# EAGLE board E-Piano-SM (EAGLE 9.4.0)
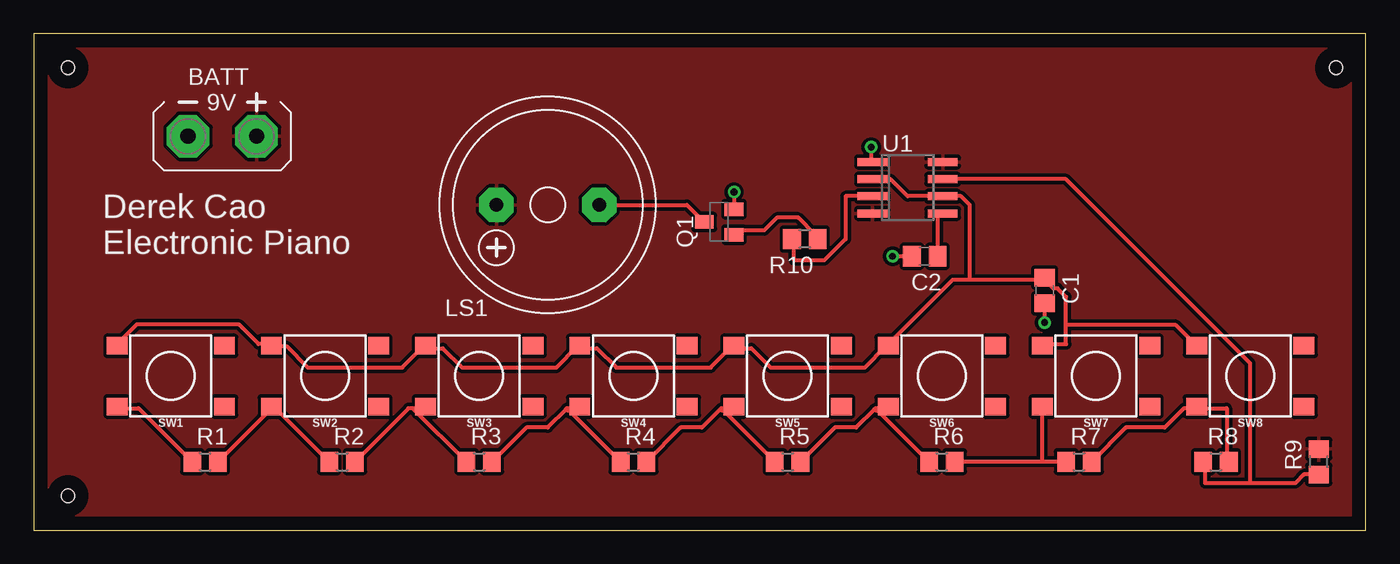
[diagram p0: board, top side]
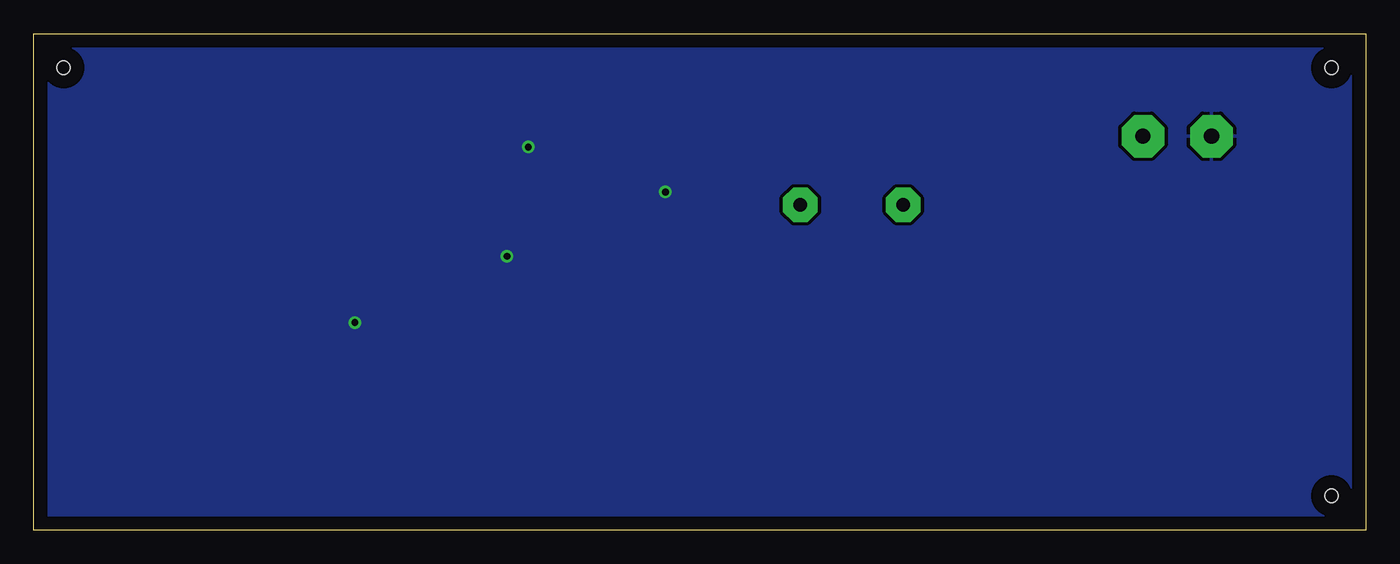
[diagram p1: board, bottom side, seen from below]

Size 98.73 x 36.82 mm. Coordinates in mm from the lower left corner, seen from the top.
Outline: 0,0 98.73,0 98.73,36.82 0,36.82 0,0
Copper layers (1*16): Top 0.035mm / dielectric 1.5mm / Bottom 0.035mm
Design rules "default": minimum track width 6mil, minimum drill 0.35mm, track to track 6mil, track to pad 6mil, pad to pad 6mil, via to via 6mil, smd to smd 6mil, copper to edge 40mil, drill to drill 6mil, minimum pad ring 10mil, minimum via ring 8mil, stop-mask expansion 4mil, vias tented up to drill 0mil, thermal gap 10mil
Net classes: 0 default: width 0.305 mm, drill 0.508 mm, clearance 0.254 mm
Holes 1 mm at 2.54,34.29 2.54,2.54 96.52,34.29

## Footprints (pad centres in the part's own frame; a part is rotated, then mirrored left to right if it is on the bottom)
AB9V = drill 1.118 pad 3.15 octagon: + 0,2.54; - 0,-2.54
C0805 = smd 1.3 x 1.5: 1 -0.95,0; 2 0.95,0
F/HMB = drill 1.016 pad 2.54 octagon: + 3.81,0; - -3.81,0
SOT23-BEC = smd 1 x 1.4: B -0.95,-1.1; C 0,1.1; E 0.95,-1.1
R0805 = smd 1.3 x 1.5: 1 -0.95,0; 2 0.95,0
TACTILE_SWITCH_SMD_6.2MM_TALL = smd 1.55 x 1.3: A1 -3.975,-2.25; A2 3.975,-2.25; B1 -3.975,2.25; B2 3.975,2.25
SO08 = smd 0.6 x 2.2: 1 -1.905,-2.6; 2 -0.635,-2.6; 3 0.635,-2.6; 4 1.905,-2.6; 5 1.905,2.6; 6 0.635,2.6; 7 -0.635,2.6; 8 -1.905,2.6

## Placement (x,y rotation side)
BATT  AB9V  [AB9V]  13.97,29.21 270 top
C1  0.1uF  [C0805]  74.93,17.78 270 top
C2  0.1uF  [C0805]  66.04,20.32 180 top
LS1  [F/HMB]  38.1,24.13 180 top
Q1  BCW66  [SOT23-BEC]  50.8,22.86 90 top
R1  1.5K  [R0805]  12.7,5.08 0 top
R2  1.3K  [R0805]  22.86,5.08 0 top
R3  620  [R0805]  33.02,5.08 0 top
R4  1.1K  [R0805]  44.45,5.08 0 top
R5  1K  [R0805]  55.88,5.08 0 top
R6  910  [R0805]  67.31,5.08 0 top
R7  390  [R0805]  77.47,5.08 0 top
R8  6.2K  [R0805]  87.63,5.08 0 top
R9  1K  [R0805]  95.25,5.08 90 top
R10  1K  [R0805]  57.15,21.59 180 top
SW1  MOMENTARY-SWITCH-SPST-SMD-6.2MM-TALL  [TACTILE_SWITCH_SMD_6.2MM_TALL]  10.16,11.43 180 top
SW2  MOMENTARY-SWITCH-SPST-SMD-6.2MM-TALL  [TACTILE_SWITCH_SMD_6.2MM_TALL]  21.59,11.43 180 top
SW3  MOMENTARY-SWITCH-SPST-SMD-6.2MM-TALL  [TACTILE_SWITCH_SMD_6.2MM_TALL]  33.02,11.43 180 top
SW4  MOMENTARY-SWITCH-SPST-SMD-6.2MM-TALL  [TACTILE_SWITCH_SMD_6.2MM_TALL]  44.45,11.43 180 top
SW5  MOMENTARY-SWITCH-SPST-SMD-6.2MM-TALL  [TACTILE_SWITCH_SMD_6.2MM_TALL]  55.88,11.43 180 top
SW6  MOMENTARY-SWITCH-SPST-SMD-6.2MM-TALL  [TACTILE_SWITCH_SMD_6.2MM_TALL]  67.31,11.43 180 top
SW7  MOMENTARY-SWITCH-SPST-SMD-6.2MM-TALL  [TACTILE_SWITCH_SMD_6.2MM_TALL]  78.74,11.43 180 top
SW8  MOMENTARY-SWITCH-SPST-SMD-6.2MM-TALL  [TACTILE_SWITCH_SMD_6.2MM_TALL]  90.17,11.43 180 top
U1  NE555D  [SO08]  64.77,25.4 270 top

## Library data of the parts
BATT = battery
C1 C2 = rcl; MOUSER#: 791-MT21B104K500CT; MPN: MT21B104K500CT; OC_NEWARK: unknown; SPICEPREFIX: C
LS1 = buzzer; MOUSER#: 665-AST-01508MR-R; OC_FARNELL: unknown; OC_NEWARK: unknown
Q1 = transistor; MF: INFINION TECHNOLOGIES; MOUSER#: 726-BCW66KHE6327HTSA; MPN: BCW66KHE6327HTSA1; OC_NEWARK: 58K2048
R1 = rcl; MOUSER#: 652-CR0805FX-1501ELF; MPN: CR0805FX-1501ELF; OC_NEWARK: unknown; SPICEPREFIX: R
R2 = rcl; MOUSER#: 652-CR0805JW-132ELF; MPN: CR0805JW-132ELF; OC_NEWARK: unknown; SPICEPREFIX: R
R3 = rcl; MOUSER#: 652-CR0805JW-621ELF; MPN: CR0805JW-621ELF; OC_NEWARK: unknown; SPICEPREFIX: R
R4 = rcl; MOUSER#: 652-CR0805FX-1101ELF; MPN: CR0805FX-1101ELF; OC_NEWARK: unknown; SPICEPREFIX: R
R5 R9 R10 = rcl; MOUSER#: 652-CR0805FX-1001ELF; MPN: CR0805FX-1001ELF; OC_NEWARK: unknown; SPICEPREFIX: R
R6 = rcl; MOUSER#: 652-CR0805FX-9100ELF; MPN: CR0805FX-9100ELF; OC_NEWARK: unknown; SPICEPREFIX: R
R7 = rcl; MOUSER#: 652-CR0805JW-391ELF; MPN: CR0805JW-391ELF; OC_NEWARK: unknown; SPICEPREFIX: R
R8 = rcl; MOUSER#: 652-CR0805FX-6201ELF; MPN: CR0805FX-6201ELF; OC_NEWARK: unknown; SPICEPREFIX: R
SW1-SW8 = SparkFun-Switches; MOUSER#: 653-B3F-1000; OC_NEWARK: unknown; PROD_ID: SWCH-11966; SF_SKU: COM-12992
U1 = linear; MOUSER#: 595-TLC555CDR; MPN: TLC555CDR; OC_NEWARK: 24M8296

## Nets
0: BATT.- C1.2 C2.2 Q1.E U1.1
N$1: R7.2 R8.2 SW8.B2
N$2: R8.1 R9.1 U1.7
N$3: R1.1 SW1.B2
N$4: R6.2 R7.1 SW7.B2
N$5: R5.2 R6.1 SW6.B2
N$6: R4.2 R5.1 SW5.B2
N$7: R3.2 R4.1 SW4.B2
N$8: R2.2 R3.1 SW3.B2
N$9: R1.2 R2.1 SW2.B2
N$11: R10.2 U1.3
N$12: C2.1 U1.5
N$13: LS1.- Q1.C
N$14: Q1.B R10.1
TR: C1.1 SW1.A2 SW2.A2 SW3.A2 SW4.A2 SW5.A2 SW6.A2 SW7.A2 SW8.A2 U1.2 U1.6
VCC: BATT.+ LS1.+ R9.2 U1.4 U1.8

## Tracks (layer width: path | path; a pad name or v marks a point on that pad's centre or on a via)
0  (via drill 0.51)
  Top 0.305: v51.91,25.08 51.91,23.81 Q1.E | v63.66,20.32 C2.2 | v74.93,15.4 C1.2 | v62.07,28.42 62.07,27.3 U1.1
  pour Bottom: -1.27,38.1 -1.27,-1.27 100.33,-1.27 100.33,36.83 99.06,38.1
N$1
  Top 0.305: R7.2 80.96,7.62 83.82,7.62 85.25,9.05 86.04,9.05 SW8.B2 86.2,9.05 88.42,9.05 88.42,5.08 R8.2
N$2
  Top 0.305: 90.17,3.49 93.5,3.49 94.14,4.13 R9.1 | 90.17,3.49 86.84,3.49 86.84,5.08 R8.1 | U1.7 76.52,26.04 90.17,12.38 90.17,3.49
N$3
  Top 0.305: R1.1 7.78,9.05 6.19,9.05 SW1.B2
N$4
  Top 0.305: R7.1 74.77,5.08 | 74.77,5.08 R6.2 | 74.77,5.08 74.77,9.05 SW7.B2
N$5
  Top 0.305: 62.31,8.97 62.39,9.05 63.18,9.05 SW6.B2 | 62.31,8.97 60.96,7.62 59.37,7.62 R5.2 | R6.1 62.55,8.89 62.39,8.89 62.31,8.97
N$6
  Top 0.305: 50.88,8.97 50.96,9.05 51.75,9.05 SW5.B2 | 50.88,8.97 49.53,7.62 47.94,7.62 R4.2 | R5.1 51.12,8.89 50.96,8.89 50.88,8.97
N$7
  Top 0.305: 39.45,8.97 39.53,9.05 40.32,9.05 SW4.B2 | 39.45,8.97 38.1,7.62 36.51,7.62 R3.2 | R4.1 39.69,8.89 39.53,8.89 39.45,8.97
N$8
  Top 0.305: 28.1,9.05 28.89,9.05 SW3.B2 | 28.1,9.05 27.78,9.05 R2.2 | 28.1,9.05 R3.1
N$9
  Top 0.305: R1.2 17.62,9.05 SW2.B2 17.62,8.89 18.1,8.89 R2.1
N$11
  Top 0.305: U1.3 60.17,24.77 60.17,21.59 58.58,20 56.36,20 56.36,21.59 R10.2
N$12
  Top 0.305: U1.5 66.99,23.5 C2.1
N$13
  Top 0.305: LS1.- 48.42,24.13 Q1.C
N$14
  Top 0.305: Q1.B 51.91,22.07 52.07,22.23 54.13,22.23 55.09,23.18 56.67,23.18 57.94,21.91 57.94,21.59 R10.1
TR
  Top 0.305: U1.2 63.5,26.04 64.77,24.77 U1.6 68.74,24.77 69.37,24.13 69.37,18.57 | 74.93,18.57 75.56,17.94 75.88,17.94 76.52,17.3 76.52,15.24 | 76.52,15.24 76.52,13.81 74.77,13.81 SW7.A2 | 74.93,18.57 69.37,18.57 | 69.37,18.57 68.1,18.57 63.34,13.81 SW6.A2 63.18,13.65 61.59,12.06 54.61,12.06 53.18,13.49 51.75,13.49 SW5.A2 51.75,13.65 50.16,12.06 43.18,12.06 41.75,13.49 40.32,13.49 SW4.A2 40.32,13.65 38.73,12.06 31.75,12.06 30.32,13.49 28.89,13.49 SW3.A2 28.89,13.65 27.3,12.06 20.32,12.06 18.73,13.65 17.62,13.65 SW2.A2 17.46,13.81 16.67,13.81 15.24,15.24 7.62,15.24 6.19,13.81 SW1.A2 | 74.93,18.57 C1.1 | 76.52,15.24 84.61,15.24 86.04,13.81 SW8.A2
VCC
  pour Top: -1.27,38.1 -1.27,-1.27 0,-2.54 100.33,-2.54 100.33,38.1

## Text on the board
tPlace: Derek Cao / Electronic Piano